# EAGLE board LCD_klein (EAGLE 5.09)
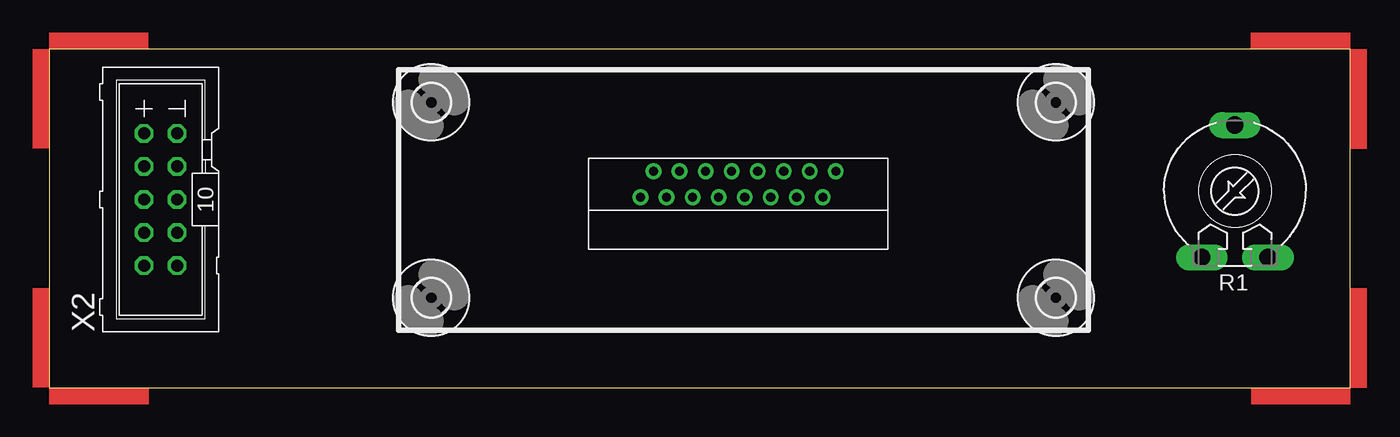
[diagram p0: board, top side]
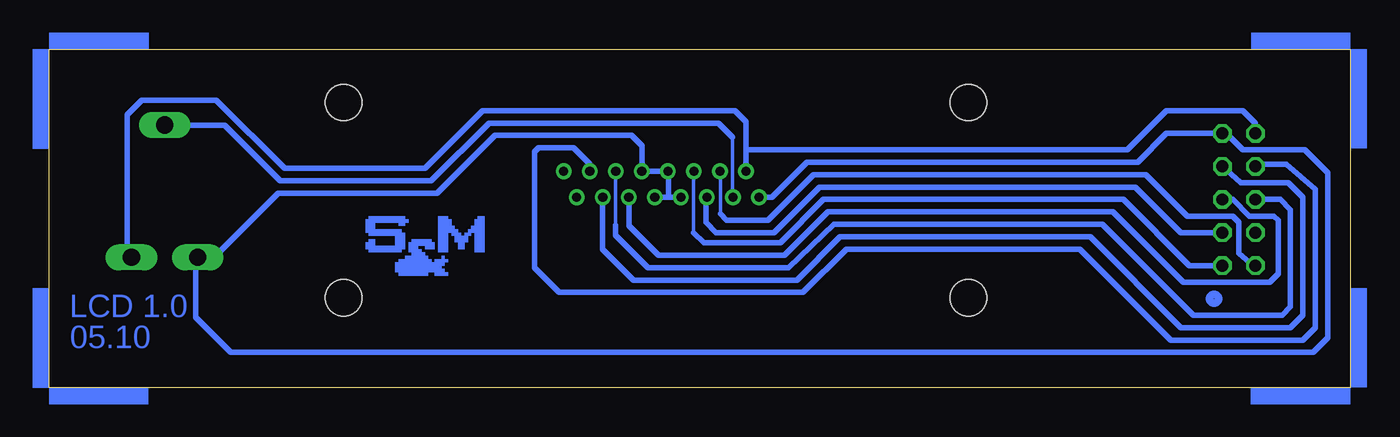
[diagram p1: board, bottom side, seen from below]

Size 100 x 26 mm. Coordinates in mm from the lower left corner, seen from the top.
Outline: 0,0 100,0 100,26 0,26 0,0
Copper layers (1*16): Top 0.035mm / dielectric 1.5mm / Bottom 0.035mm
Design rules "default *": minimum track width 10mil, minimum drill 24mil, track to track 8mil, track to pad 8mil, pad to pad 8mil, via to via 8mil, smd to smd 8mil, copper to edge 40mil, drill to drill 8mil, minimum pad ring 10mil, minimum via ring 8mil, stop-mask expansion 4mil, vias tented up to drill 0mil, thermal gap 10mil

## Footprints (pad centres in the part's own frame; a part is rotated, then mirrored left to right if it is on the bottom)
LI10 = drill 1.321 long: A -2.54,-5.08; E 2.54,-5.08; S 0,5.08
2,8 = hole 2.8: 0,0
VERBINDUNGSSTECKER_DISPLAY = drill 0.7 round: DB0 13,3; DB1 12,1; DB2 11,3; DB3 10,1; DB4 9,3; DB5 8,1; DB6 7,3; DB7 6,1; E 14,1; P$15 5,3; P$16 4,1; R/W 15,3; RS 16,1; V0 17,3; VDD 18,1; VSS 19,3
ML10 = drill 0.914 octagon: 0 -5.08,-1.27; 1 -5.08,1.27; 2 -2.54,-1.27; 3 -2.54,1.27; 4 0,-1.27; 5 0,1.27; 6 2.54,-1.27; 7 2.54,1.27; +5V 5.08,1.27; GND 5.08,-1.27

## Placement (x,y rotation side)
R1  LI101  [LI10]  91.12,15.08 0 top
U$1  [2,8]  29.36,21.9 0 top
U$2  [2,8]  29.36,6.9 0 top
U$3  [2,8]  77.36,21.9 0 top
U$4  [2,8]  77.36,6.9 0 top
U$5  [ANGLE-ARROW-NW1-16]  0,26 0 top
U$6  [ANGLE-ARROW-SE1-16]  100,0 0 top
U$7  [ANGLE-ARROW-SW1-16]  0,0 0 top
U$8  [ANGLE-NE1-16]  100,26 0 top
U$9  [SM_LOGO_BOTTOM]  75.56,8.73 0 top
X1  VERBINDUNGSSTECKER_DISPLAY  [VERBINDUNGSSTECKER_DISPLAY]  64.45,17.62 180 top
X2  ML10PIC  [ML10]  8.57,14.45 90 top

## Library data of the parts
R1 U$9 X2 = PIC
U$1-U$4 = holes
U$5-U$8 = marks
X1 = Roboter

## Nets
+5V: R1.E X1.VDD X2.+5V
GND: R1.A X1.DB0 X1.DB1 X1.DB2 X1.DB3 X1.VSS X2.GND
N$1: R1.S X1.V0
N$2: X1.E X2.0
N$3: X1.RS X2.1
N$4: X1.R/W X2.2
N$5: X1.DB7 X2.7
N$6: X1.DB6 X2.6
N$7: X1.DB5 X2.5
N$8: X1.DB4 X2.4

## Tracks (layer width: path | path; a pad name or v marks a point on that pad's centre or on a via)
+5V
  Bottom 0.406: 46.45,18.26 X1.VDD | X2.+5V 7.3,20.32 8.26,21.27 14.13,21.27 17.14,18.26 46.45,18.26 | 46.45,18.26 46.45,20.42 47.31,21.27 66.67,21.27 71.12,16.83 81.92,16.83 87.15,22.07 92.87,22.07 93.98,20.95 93.98,10.32 R1.E
GND
  Bottom 0.406: X1.DB3 54.45,18.57 55.24,19.37 65.72,19.37 70.17,14.92 82.39,14.92 87,10.32 88.27,10.32 R1.A 88.74,9.84 88.74,5.4 86.04,2.7 2.86,2.7 1.75,3.81 1.75,16.51 3.49,18.26 8.26,18.26 9.53,19.53 X2.GND 14.13,19.53 16.35,17.3 41.75,17.3 44.43,14.62 X1.VSS | X1.DB3 X1.DB1 | 52.39,14.62 X1.DB0 | 52.39,14.62 X1.DB2 | X1.DB3 52.44,16.62 52.39,16.67 52.39,14.62
N$1
  Bottom 0.254: 47.47,19.21 47.47,14.63 X1.V0
  Bottom 0.406: 47.47,19.21 48.58,20.32 66.2,20.32 70.64,15.88 82.23,15.88 86.52,20.16 R1.S
N$2
  Bottom 0.254: 50.48,11.91 50.48,16.43 X1.E
  Bottom 0.406: 50.48,11.91 49.69,11.11 43.81,11.11 40.48,14.45 17.46,14.45 12.38,9.37 X2.0
N$3
  Bottom 0.254: 48.42,13.34 48.42,16.59 X1.RS
  Bottom 0.406: X2.1 7.46,9.37 8.57,10.32 8.57,12.7 8.73,12.86 9.05,13.18 12.54,13.18 15.72,16.35 24.29,16.35 26.51,16.35 41.27,16.35 44.77,12.86 47.94,12.86 48.42,13.34
N$4
  Bottom 0.406: X1.R/W 49.53,14.54 49.53,12.7 48.74,11.91 44.29,11.91 40.8,15.4 26.51,15.4 24.29,15.4 16.51,15.4 13.02,11.91 X2.2
N$5
  Bottom 0.406: X1.DB7 58.45,17.18 59.69,18.41 62.39,18.41 62.71,18.1 62.71,9.21 60.8,7.3 60.48,7.3 42.07,7.3 38.73,10.64 20.8,10.64 13.81,3.65 3.65,3.65 2.7,4.6 2.7,15.24 4.92,17.14 7.14,17.14 X2.7
N$6
  Bottom 0.406: X1.DB6 57.45,10.62 55.09,8.26 42.55,8.26 39.21,11.59 20,11.59 13.02,4.6 4.6,4.6 3.65,5.56 3.65,14.61 4.76,15.72 8.41,15.72 X2.6
N$7
  Bottom 0.254: 56.45,12.48 X1.DB5
  Bottom 0.406: X2.5 5.4,14.45 4.6,13.65 4.6,6.19 5.24,5.56 12.06,5.56 19.05,12.54 39.69,12.54 43.18,9.21 53.98,9.21 56.45,11.69 56.45,12.48
N$8
  Bottom 0.406: X1.DB4 55.45,12.43 53.18,10.16 43.5,10.16 40.16,13.49 18.26,13.49 12.86,8.1 6.19,8.1 5.56,8.73 5.56,12.86 5.87,13.18 7.78,13.18 9.05,14.45 X2.4

## Text on the board
Bottom: LCD 1.0 | 05.10
Measures: 26mm | 100mm